# EAGLE board badge (EAGLE 7.2.0)
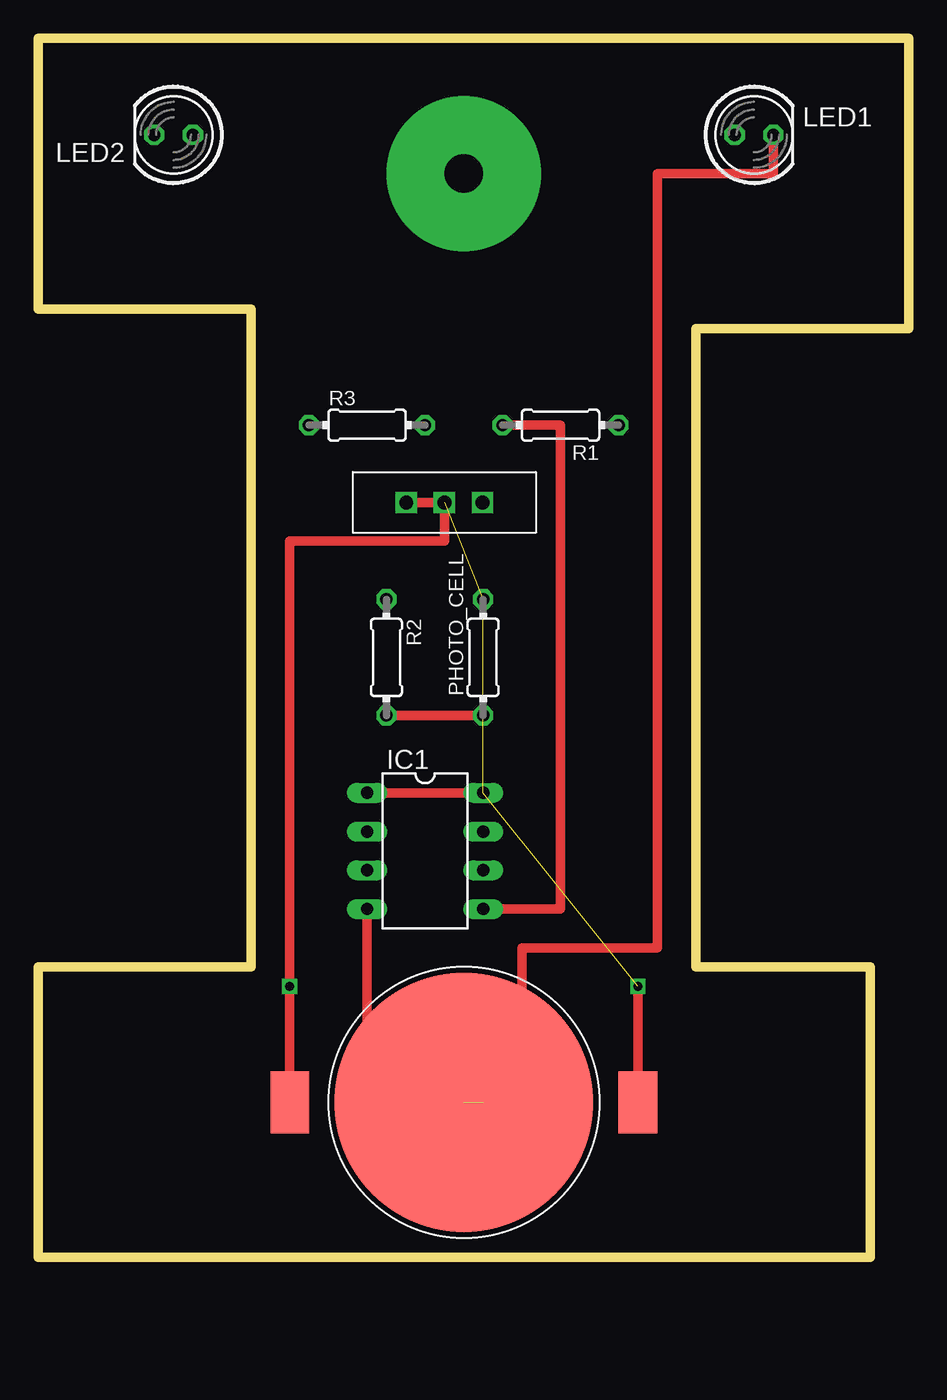
[diagram p0: board, top side]
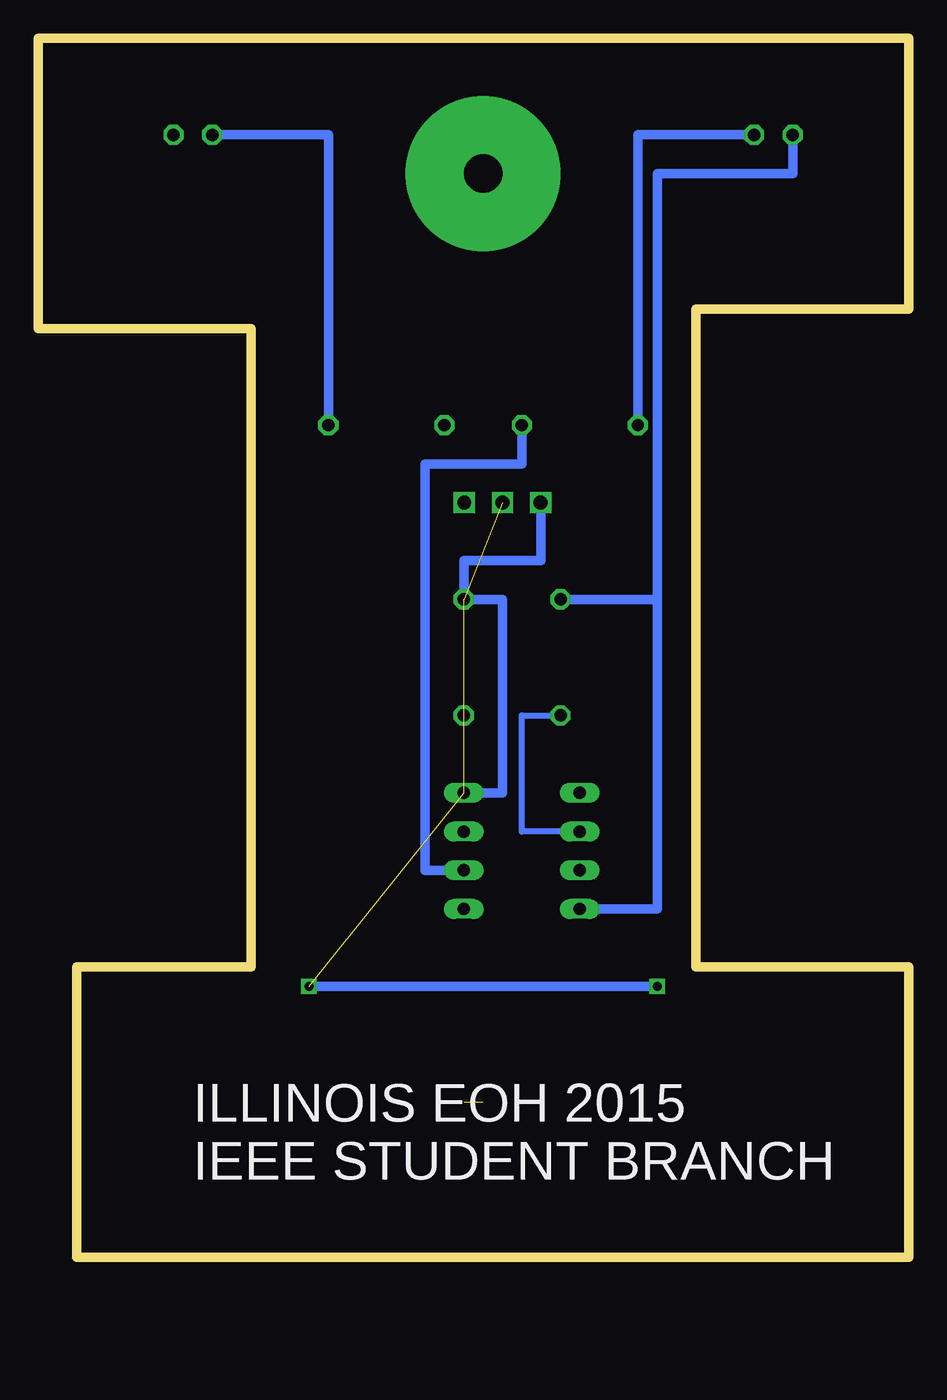
[diagram p1: board, bottom side, seen from below]

Size 57.15 x 80.01 mm. Coordinates in mm from the lower left corner, seen from the top.
Outline: 0,0 54.28,0
Outline: 0,0 54.61,0 54.61,19.05 43.18,19.05 43.18,60.96 57.15,60.96 57.15,80.01 0,80.01 0,62.23 13.97,62.23 13.97,19.05 0,19.05 0,0
Copper layers (1*16): Top 0.035mm / dielectric 1.5mm / Bottom 0.035mm
Design rules "default": minimum track width 10mil, minimum drill 24mil, track to track 8mil, track to pad 8mil, pad to pad 8mil, via to via 8mil, smd to smd 8mil, copper to edge 40mil, drill to drill 8mil, minimum pad ring 10mil, minimum via ring 8mil, stop-mask expansion 4mil, vias tented up to drill 0mil, thermal gap 10mil

## Footprints (pad centres in the part's own frame; a part is rotated, then mirrored left to right if it is on the bottom)
DIL08 = drill 0.813 long: 1 -3.81,-3.81; 2 -1.27,-3.81; 3 1.27,-3.81; 4 3.81,-3.81; 5 3.81,3.81; 6 1.27,3.81; 7 -1.27,3.81; 8 -3.81,3.81
LED5MM = drill 0.813 octagon: A -1.27,0; K 1.27,0
0204/7 = drill 0.813 octagon: 1 -3.81,0; 2 3.81,0
COIN_CELL_SPARKFUN = smd 17 x 17: CENTER 0,0 | smd 2.54 x 4.08: SIDE_1 -11.41,0; SIDE_2 11.43,0
SPDT_SPARKFUN = drill 0.9 square: COMM 0,0; OUT_1 -2.5,0; OUT_2 2.5,0

## Placement (x,y rotation side)
IC1  TINY13-20PU  [DIL08]  25.4,26.67 270 top
LED1  [LED5MM]  46.99,73.66 0 top
LED2  [LED5MM]  8.89,73.66 180 top
PHOTO_CELL  [0204/7]  29.21,39.37 90 top
R1  [0204/7]  34.29,54.61 180 top
R2  10k  [0204/7]  22.86,39.37 270 top
R3  [0204/7]  21.59,54.61 0 top
U$1  COIN_CELL_SPARKFUN  [COIN_CELL_SPARKFUN]  27.94,10.16 0 top
U$2  SPST_SPARKFUN  [SPDT_SPARKFUN]  26.67,49.53 0 top

## Library data of the parts
IC1 = atmel; MPN: ATTINY13-20PU; OC_FARNELL: 9171550; OC_NEWARK: 96K6521
LED1 LED2 = led
PHOTO_CELL R1-R3 = resistor
U$1 U$2 = eoh

## Nets
GND: IC1.4 LED1.K LED2.K R2.1 U$1.CENTER
LED_OUT_1: IC1.5 R1.2
LED_OUT_2: IC1.6 R3.2
N$2: LED1.A R1.1
N$5: LED2.A R3.1
PHOTO_LEVEL: IC1.2 PHOTO_CELL.1 R2.2
VDD: IC1.1 IC1.8 PHOTO_CELL.2 U$1.SIDE_1 U$1.SIDE_2 U$2.COMM U$2.OUT_1

## Tracks (layer width: path | path; a pad name or v marks a point on that pad's centre or on a via)
GND  (1 unrouted)
  Top 0.61: IC1.4 21.59,10.16 U$1.CENTER | LED1.K 48.26,71.12 40.64,71.12 40.64,20.32 31.75,20.32 31.75,12.7 29.21,12.7 29.21,10.16
  Bottom 0.61: IC1.4 16.51,22.86 16.51,43.18 | 16.51,43.18 R2.1 | LED2.K 7.62,71.12 16.51,71.12 16.51,43.18
LED_OUT_1
  Top 0.61: IC1.5 34.29,22.86 34.29,54.61 R1.2
LED_OUT_2
  Bottom 0.61: IC1.6 31.75,25.4 31.75,52.07 25.4,52.07 R3.2
N$2
  Bottom 0.61: LED1.A 38.1,73.66 R1.1
N$3  (via drill 2.54 pad 10.16)
  other vias: 27.94,71.12
N$5
  Bottom 0.61: LED2.A 17.78,73.66 R3.1
PHOTO_LEVEL
  Top 0.61: R2.2 PHOTO_CELL.1
  Bottom 0.406: IC1.2 25.4,27.94 25.4,35.56 R2.2
VDD  (via drill 0.6)  (3 unrouted)
  Top 0.61: U$1.SIDE_1 16.51,10.16 v16.51,17.78 16.51,46.99 26.67,46.99 U$2.COMM U$2.OUT_1 | U$1.SIDE_2 v39.37,17.78 | IC1.8 IC1.1
  Bottom 0.61: v39.37,17.78 v16.51,17.78 | 24.13,49.53 24.13,45.72 29.21,45.72 PHOTO_CELL.2 26.67,43.18 26.67,30.48 IC1.8

## Text on the board
bNames: ILLINOIS EOH 2015 / IEEE STUDENT BRANCH